# Altium PCB Anya_2620_V1_I1.PcbDoc (part 1 of 2)
Units mm, origin at the board's own origin, x right, y up, seen from the top; angles counter-clockwise.
Board outline 70 x 70 mm, 2 copper layers (Top Layer, Bottom Layer), stack 1.671 mm thick; 61 components, 36 nets, 234 pads, 129 vias.
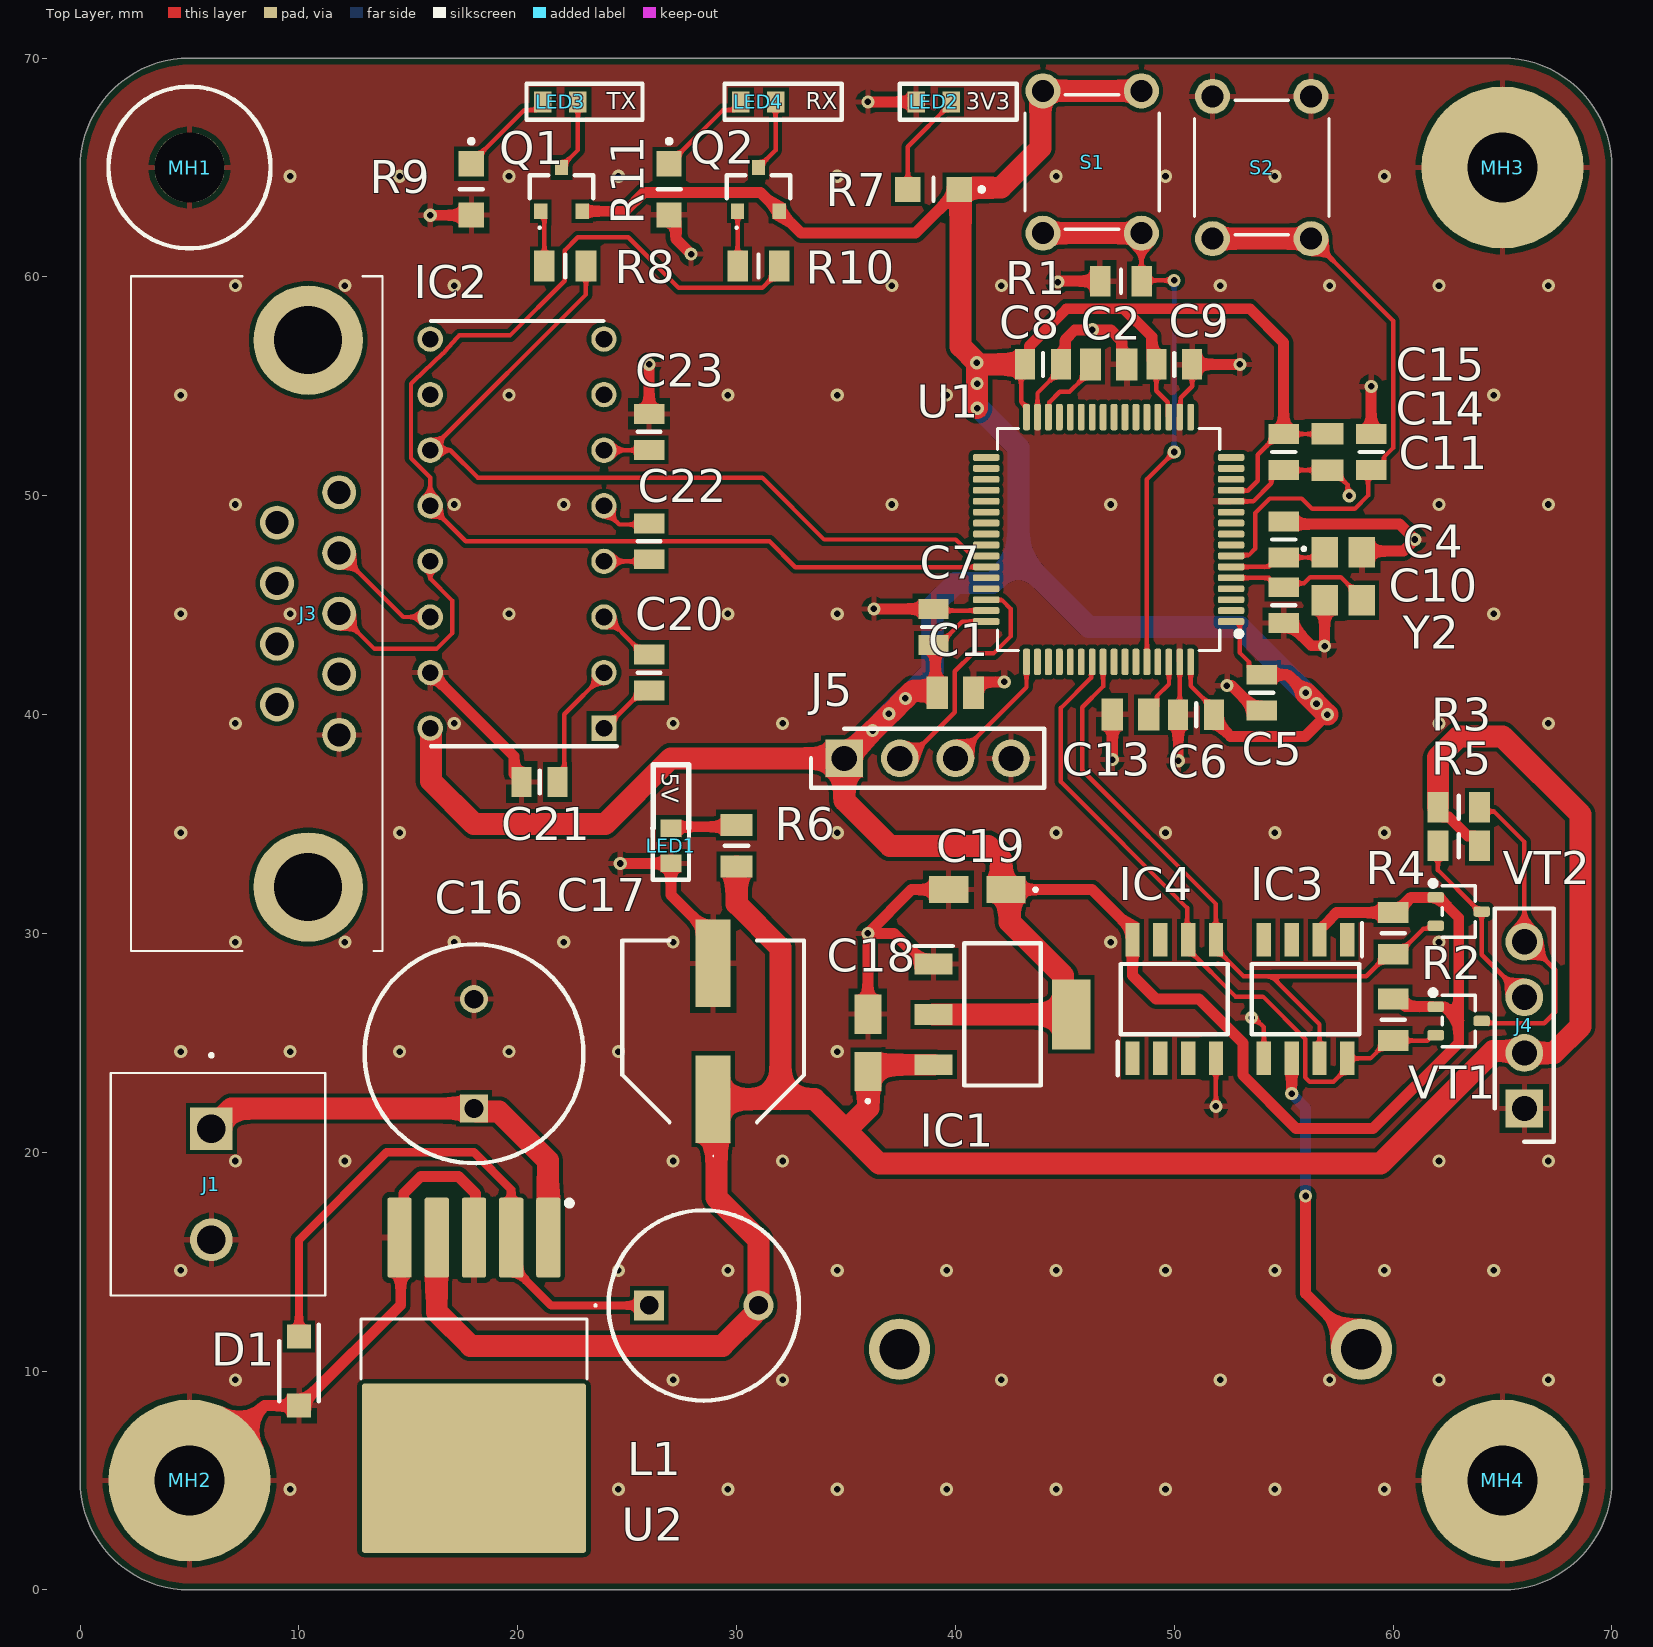
[diagram p0: Top Layer view]
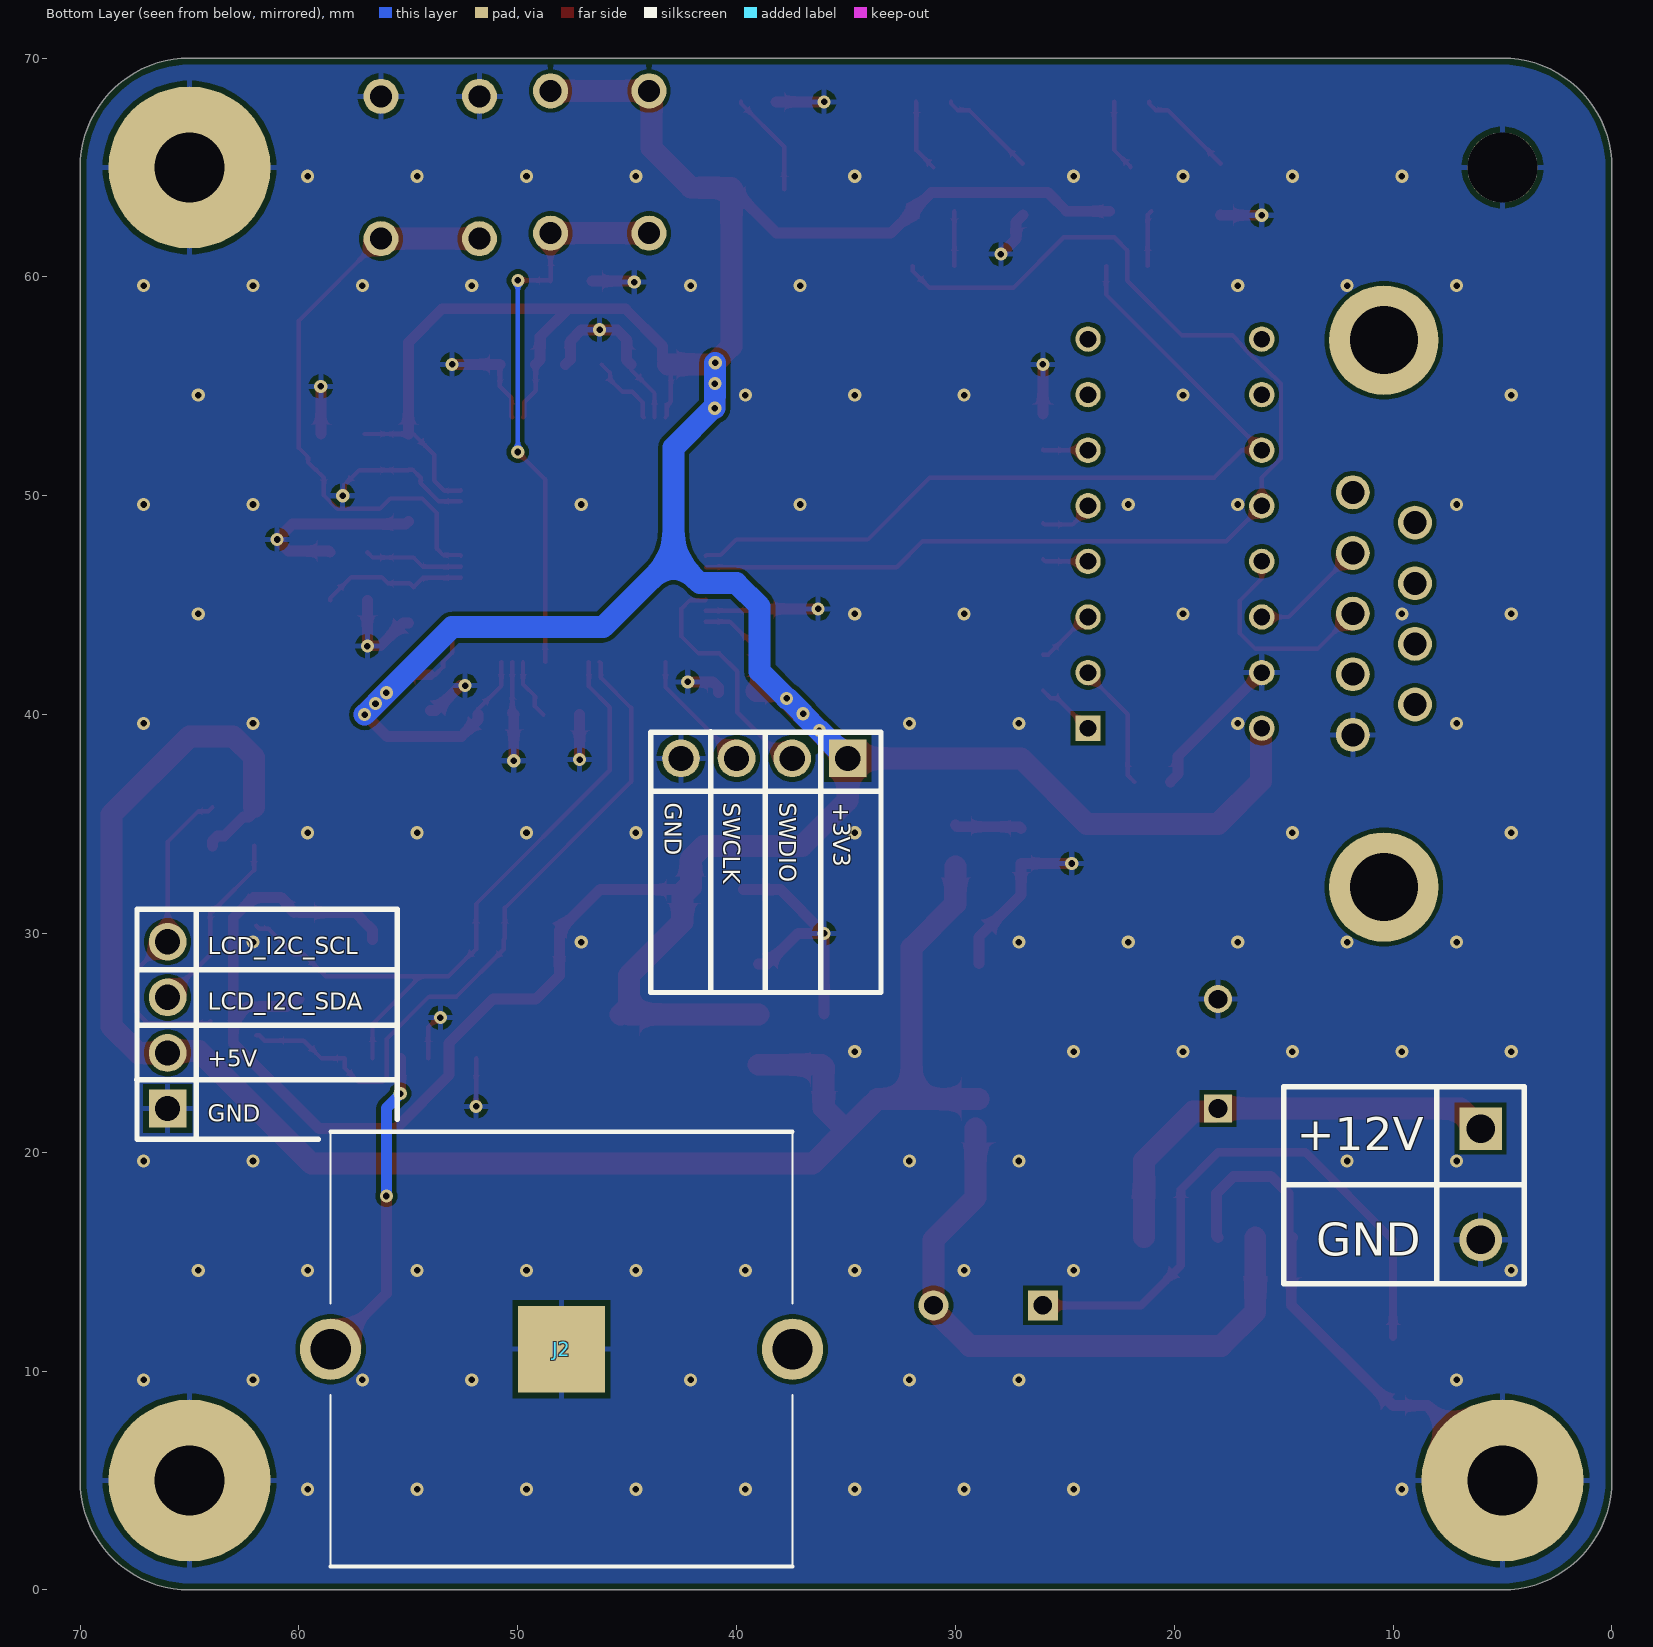
[diagram p1: Bottom Layer view, seen from below]
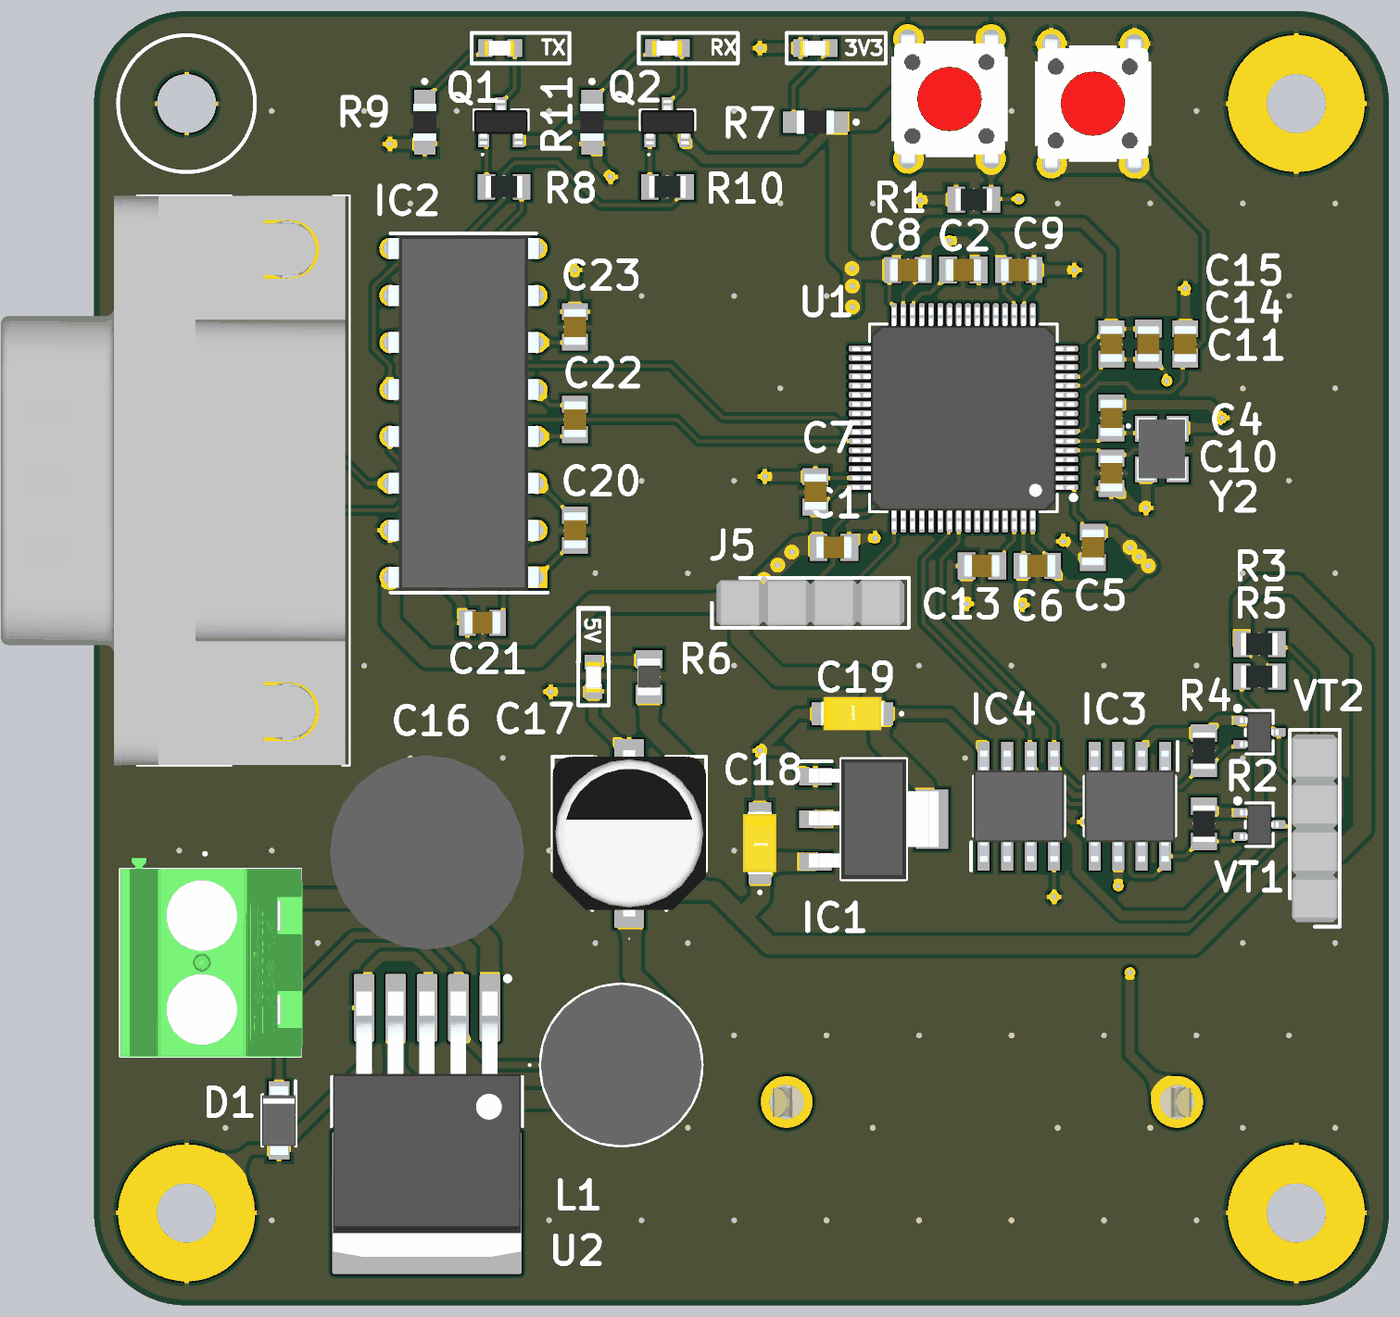
[diagram p2: 3D render of the assembled board from above, using the file's embedded part models]

## Layer stack, top to bottom
Top Solder: solder mask 0.0102, Solder Resist, Dk 3.5
Top Layer: signal copper 0.0356
Dielectric 1: dielectric 1.6, FR-4, Dk 4.8
Bottom Layer: signal copper 0.0356
Bottom Solder: solder mask 0.0102, Solder Resist, Dk 3.5

## Board outline
5,0 cw(c5,5) 0,5 0,65 cw(c5,65) 5,70 65,70 cw(c65,65) 70,65 70,5 cw(c65,5) 65,0

## Design rules (kind name [scope] priority, off if disabled: settings)
BoardOutlineClearance [All] p1: gap=0.3 ignorepadtopadclearanceinfootprint=FALSE
Clearance [All] p1: gap=0.2 ignorepadtopadclearanceinfootprint=TRUE
ComponentClearance [All] p1: gap=0.2 collisioncheckmode=3 verticalgap=0.2 showdistances=FALSE
HoleSize [All] p1: absolutevalues=TRUE maxlimit=10 minlimit=0.2 maxpercent=80.000 minpercent=20.000
HoleToHoleClearance [All] p1: gap=0.3 allowstackedmicrovias=TRUE
MinimumSolderMaskSliver [All] p1: minsoldermaskwidth=0.1
PolygonConnect [All] p1: connectstyle=Relief reliefconductorwidth=0.254 reliefentries=4 polygonreliefangle="90 Angle" airgapwidth=0.254
RoutingVias [All] p1: holewidth=0.3 width=0.6 viastyle="Through Hole" minholewidth=0.3 minwidth=0.6 maxholewidth=0.3 maxwidth=0.6
SilkToSilkClearance [All] p1: silktosilkclearance=0.1
SilkToSolderMaskClearance [IsPad] p1: minsilkscreentomaskgap=0.1 clearancetoexposedcopper=TRUE
SolderMaskExpansion [All] p1: expansion=0.1 istentingtop=FALSE
SupplyNets "Schematic Supply Nets_5" [InNet('+12')] p1: voltage=0.000
SupplyNets "Schematic Supply Nets_4" [InNet('+3.3')] p2: voltage=0.000
SupplyNets "Schematic Supply Nets_3" [InNet('GND')] p3: voltage=0.000
SupplyNets "Schematic Supply Nets_2" [InNet('+5')] p4: voltage=0.000
SupplyNets "Schematic Supply Nets" [InNet('+3_BAT')] p5: voltage=0.000
Width [All] p1: maxlimit=1 minlimit=0.2 preferedwidth=0.5
24 further rules are at their usual default settings.

## Components (designator, comment, footprint, x,y, rotation, side; value= is the part's Value field where it differs from the comment)
C1 "1uF / 50V" CAPC2012X145N 40,41 r180 top
C2 "2.2uF / 16V" CAPC2012X145N 47,56 r180 top
C4 "15pF / 50V" CAPC2012X75N 55,48 r90 top
C5 "100nF / 50V" CAPC2012X95N 54,41 r90 top
C6 "100nF / 50V" CAPC2012X95N 51,40 r0 top
C7 "100nF / 50V" CAPC2012X95N 39,44 r270 top
C8 "100nF / 50V" CAPC2012X95N 44,56 r180 top
C9 "100nF / 50V" CAPC2012X95N 50,56 r180 top
C10 "15pF / 50V" CAPC2012X75N 55,45 r270 top
C11 "100nF / 50V" CAPC2012X95N 59,52 r270 top
C13 "2.2uF / 16V" CAPC2012X145N 48,40 r0 top
C14 "1uF / 50V" CAPC2012X145N 57,52 r90 top
C15 "100nF / 50V" CAPC2012X95N 55,52 r90 top
C16 "680uF / 25V" CAPPRD500W65D1000H1750 18,22 r90 top
C17 "220uF / 16V" EEEFK0J331AL 28.932,25.529 r90 top
C18 "10uF / 10V" T491A 36,25 r90 top
C19 "10uF / 10V" T491A 41,32 r180 top
C20 "100nF / 50V" CAPC2012X95N 26,41.92 r90 top
C21 "100nF / 50V" CAPC2012X95N 21,36.92 r180 top
C22 "100nF / 50V" CAPC2012X95N 26,47.92 r270 top
C23 "100nF / 50V" CAPC2012X95N 26,52.92 r90 top
D1 "SS34LWHRVG" SODFL3718X102N 10,10 r270 top
D2 "LCD" LCD 95,38 r90 top
IC1 "LM1117MP-3.3_NOPB" SOT230P700X180-4N 42.15,26.3 r0 top
IC2 "MAX3232CPE" DIP794W56P254L1918H457Q16N 19.97,48.27 r180 top
IC3 "DS3232MZ_V+T" SOIC127P600X175-8N 56,27 r270 top
IC4 "MB85RC16PNF-G-JNE1" SOIC127P600X175-8N 50,27 r90 top
J1 "1715721" 1715721 6,21.08 r270 top
J2 "3003" 3003 37.445,11 r0 bottom
J3 "L717SDE09PA4CH4RC309" L717SDE09PA4CH4RC309 11.84,50.155 r270 top
J4 "826646-4" HDRV4W68P0X254_1X4_1016X250X880P 66,22 r90 top
J5 "826646-4" HDRV4W68P0X254_1X4_1016X250X880P 34.92,38 r0 top
L1 "33uH / 2A" RLB0912330KL 26,13 r0 top
LED1 "APT1608EC" LEDC1608X85N 27,34 r90 top
LED2 "APT1608EC" LEDC1608X85N 39,68 r0 top
LED3 "APT1608EC" LEDC1608X85N 21.95,68 r0 top
LED4 "APT1608EC" LEDC1608X85N 31,68 r0 top
MH1 "MH_7.4MMNC_3.2MMD" MH_7.4MMD_3.2MMD_NON_COPPER_NPTH 5,65 r0 top locked
MH2 "MH_7.4MMC_3.2MMD" MH_7.4MMD_3.2MMD 5,5 r0 top
MH3 "MH_7.4MMC_3.2MMD" MH_7.4MMD_3.2MMD 65,65 r0 top
MH4 "MH_7.4MMC_3.2MMD" MH_7.4MMD_3.2MMD 65,5 r0 top
Q1 "BC857,215" BC857215 22,64 r0 top
Q2 "BC857,215" BC857215 31,64 r0 top
R1 "10k / 125mW" RESC2012X60N 47.564,59.805 r0 top
R2 "10k / 125mW" RESC2012X60N 60,26.05 r90 top
R3 "10k / 125mW" RESC2012X60N 63,35.767 r180 top
R4 "10k / 125mW" RESC2012X60N 60,30 r90 top
R5 "10k / 125mW" RESC2012X60N 63,34 r0 top
R6 "1k / 125mW" RESC2013X65N 30,34 r90 top
R7 "510R / 125mW" ERJ6ENF1000V 39,64 r180 top
R8 "10k / 125mW" RESC2012X60N 22.165,60.497 r0 top
R9 "510R / 125mW" ERJ6ENF1000V 17.877,64 r270 top
R10 "10k / 125mW" RESC2012X60N 31,60.497 r0 top
R11 "510R / 125mW" ERJ6ENF1000V 26.918,64 r270 top
S1 "1825910-6" TE_1825910-6 46.25,65.25 r90 top
S2 "1825910-6" TE_1825910-6 54,65 r90 top
U1 "STM32H503RBT6" QFP64P50_1200X1200X160L60X22N 47,48 r90 top
U2 "LM2575S-5.0 (UMW)" DPAK6P170_1534X467L254X81T736X1018N 18,8 r180 top
VT1 "BSS138W-7-F" SOT23-3P65_222X100L35X30N 63,26 r270 top value=3.5Ω
VT2 "BSS138W-7-F" SOT23-3P65_222X100L35X30N 63,31 r270 top value=3.5Ω
Y2 "24MHz" 7M24000MEEQT 57.724,46.319 r270 top

## Footprints (in the part's own frame and the unit in brackets; to place one, negate y for a bottom-side part, rotate by r counter-clockwise, add the part's x,y. Pads: shape width x height; smd on the part's side, far side on the other; paste and mask are expansions set on the pad)
7M24000MEEQT [mm]
  rect 1.4x1.2 smd: 1(-1.1,-0.85) 2(1.1,-0.85) 3(1.1,0.85) 4(-1.1,0.85)
  silkscreen extent -1.3,-1.85 -1.2,-1.75, body extent -1.68,-1.33 1.68,1.33, height 0.9
3003 [mm]
  round 2.8 hole 1.85: 1(0,0) 2(21.11,0)
  rect 3.96x3.96 smd: 3(10.555,0)
  silkscreen extent 0,-9.93 21.11,9.93, body extent -0.76,-10.56 21.86,9.3, height 4
1715721 [mm]
  rect 1.95x1.95 hole 1.3: 1(0,0)
  round 1.95 hole 1.3: 2(5.08,0)
  silkscreen extent -3.4,-4.6 7.62,5.2, body extent -3.11,-4.57 7.62,5.26, height 14.2
BC857215 [mm]
  rect 0.6x0.7 smd: 1(-0.95,-1) 2(0.95,-1) 3(0,1)
  silkscreen extent -1.45,-1.8 1.45,0.65, body extent -1.45,-1.2 1.45,1.2, height 0.95
CAPC2012X75N [mm]
  rect 0.91x1.39 smd: 1(-0.82,0) 2(0.82,0)
  silkscreen extent 0,-0.53 0,0.53, body extent -1,-0.63 1,0.63, height 0.75
CAPC2012X95N [mm]
  rect 0.91x1.39 smd: 1(-0.82,0) 2(0.82,0)
  silkscreen extent 0,-0.53 0,0.53, body extent -1,-0.63 1,0.63, height 0.95
CAPC2012X145N [mm]
  rect 0.97x1.47 smd: 1(-0.83,0) 2(0.83,0)
  body extent -1,-0.63 1,0.63, height 1.45
CAPPRD500W65D1000H1750 [mm]
  rect 1.275x1.275 hole 0.85: 1(0,0)
  round 1.275 hole 0.85: 2(5,0)
  silkscreen extent -2.5,-5 7.5,5, body extent -2.75,-5.24 7.75,5.24, height 17.5
DIP794W56P254L1918H457Q16N [mm]
  rect 1.16x1.16 hole 0.76: 1(-3.97,8.89)
  round 1.16 hole 0.76: 2(-3.97,6.35) 3(-3.97,3.81) 4(-3.97,1.27) 5(-3.97,-1.27) 6(-3.97,-3.81) 7(-3.97,-6.35) 8(-3.97,-8.89) 9(3.97,-8.89) 10(3.97,-6.35) 11(3.97,-3.81) 12(3.97,-1.27) 13(3.97,1.27) 14(3.97,3.81) 15(3.97,6.35) 16(3.97,8.89)
  silkscreen extent -4.55,-9.71 3.94,9.71, body extent -4.11,-9.59 4.11,9.59, height 4.57
DPAK6P170_1534X467L254X81T736X1018N [mm] "DPAK, 1.70 mm pitch; 6 pin, 8.40 mm L X 10.03 mm W X 4.67 mm H body"
  rrect18% 1.11x3.66 smd: 1(-3.4,-8.098) 2(-1.7,-8.098) 3(0,-8.098) 4(1.7,-8.098) 5(3.4,-8.098)
  rrect3% 10.24x7.74 smd: TP(0,2.44)
  silkscreen extent -5.17,-9.8 5.17,-1.66, body extent -5.08,-8.98 5.08,5.38, height 4.66
EEEFK0J331AL [mm]
  rect 4x1.6 smd: 1(-3.1,0) 2(3.1,0)
  silkscreen extent -5.72,-4.15 4.15,4.15, body extent -4.5,-4.15 4.5,4.15, height 6.2
ERJ6ENF1000V [mm]
  rect 1.15x1.15 smd: 1(-1.175,0) 2(1.175,0)
  silkscreen extent -2.3,-0.53 0,0.53, body extent -1,-0.63 1,0.63, height 0.6
HDRV4W68P0X254_1X4_1016X250X880P [mm]
  rect 1.725x1.725 hole 1.15: 1(0,0)
  round 1.725 hole 1.15: 2(2.54,0) 3(5.08,0) 4(7.62,0)
  silkscreen extent -1.52,-1.35 9.14,1.35, body extent -1.27,-1.25 8.89,1.25, height 8.66
L717SDE09PA4CH4RC309 [mm]
  round 1.55 hole 1.05: 1(0,0) 2(2.77,0) 3(5.54,0) 4(8.31,0) 5(11.08,0) 6(1.385,-2.84) 7(4.155,-2.84) 8(6.925,-2.84) 9(9.695,-2.84)
  round 5 hole 3.1: MH1(-6.955,-1.42) MH2(18.035,-1.42)
  silkscreen extent -9.88,-9.52 20.96,1.98, body extent -9.86,-16.86 20.95,1.74, height 12.56
LCD [mm]
  body extent -40.05,-18.06 39.95,17.94, height 18.51
LEDC1608X85N [mm]
  rect 0.8x0.95 smd: 1(-0.8,0) 2(0.8,0)
  silkscreen extent -1.55,-0.82 0.8,0.82, body extent -0.83,-0.4 0.78,0.4, height 0.76
MH_7.4MMD_3.2MMD [mm]
  round 7.4 hole 3.2: 1(0,0)
MH_7.4MMD_3.2MMD_NON_COPPER_NPTH [mm]
  round 3.2 hole 3.2 unplated: 1(0,0)
  silkscreen extent -3.7,-3.7 3.7,3.7
QFP64P50_1200X1200X160L60X22N [mm] "Quad Flat Pack (QFP), 0.50 mm pitch; 64 pin, square, 16 pin X 16 pin, 10.00 mm L X 10.00 mm W X 1.60 mm H body"
  rrect52% 0.31x1.21 smd: 1(-3.75,-5.595) 2(-3.25,-5.595) 3(-2.75,-5.595) 4(-2.25,-5.595) 5(-1.75,-5.595) 6(-1.25,-5.595) 7(-0.75,-5.595) 8(-0.25,-5.595) 9(0.25,-5.595) 10(0.75,-5.595) 11(1.25,-5.595) 12(1.75,-5.595) 13(2.25,-5.595) 14(2.75,-5.595) 15(3.25,-5.595) 16(3.75,-5.595) 33(3.75,5.595) 34(3.25,5.595) 35(2.75,5.595) 36(2.25,5.595) 37(1.75,5.595) 38(1.25,5.595) 39(0.75,5.595) 40(0.25,5.595) 41(-0.25,5.595) 42(-0.75,5.595) 43(-1.25,5.595) 44(-1.75,5.595) 45(-2.25,5.595) 46(-2.75,5.595) 47(-3.25,5.595) 48(-3.75,5.595)
  rrect52% 1.21x0.31 smd: 17(5.595,-3.75) 18(5.595,-3.25) 19(5.595,-2.75) 20(5.595,-2.25) 21(5.595,-1.75) 22(5.595,-1.25) 23(5.595,-0.75) 24(5.595,-0.25) 25(5.595,0.25) 26(5.595,0.75) 27(5.595,1.25) 28(5.595,1.75) 29(5.595,2.25) 30(5.595,2.75) 31(5.595,3.25) 32(5.595,3.75) 49(-5.595,3.75) 50(-5.595,3.25) 51(-5.595,2.75) 52(-5.595,2.25) 53(-5.595,1.75) 54(-5.595,1.25) 55(-5.595,0.75) 56(-5.595,0.25) 57(-5.595,-0.25) 58(-5.595,-0.75) 59(-5.595,-1.25) 60(-5.595,-1.75) 61(-5.595,-2.25) 62(-5.595,-2.75) 63(-5.595,-3.25) 64(-5.595,-3.75)
  silkscreen extent -5.07,-6.08 5.07,5.07, body extent -6.02,-6 5.98,6, height 1.6
RESC2012X60N [mm]
  rect 0.95x1.4 smd: 1(-0.95,0) 2(0.95,0)
  silkscreen extent 0,-0.53 0,0.53, body extent -1,-0.6 1,0.6, height 0.45
RESC2013X65N [mm]
  rect 1x1.45 smd: 1(-0.95,0) 2(0.95,0)
  silkscreen extent 0,-0.54 0,0.54, body extent -1,-0.63 1,0.63, height 0.59
RLB0912330KL [mm]
  rect 1.381x1.381 hole 0.85: 1(0,0)
  round 1.381 hole 0.85: 2(5,0)
  silkscreen extent -2.5,-4.35 6.85,4.35, body extent -1.85,-4.34 6.85,4.34, height 11.1
SODFL3718X102N [mm]
  rect 1.09x1.11 smd: 1(-1.575,0) 2(1.575,0)
  silkscreen extent -2.12,-0.9 1.38,0.9, body extent -1.85,-0.9 1.85,0.9, height 1.02
SOIC127P600X175-8N [mm]
  rect 1.525x0.65 smd: 1(-2.712,1.905) 2(-2.712,0.635) 3(-2.712,-0.635) 4(-2.712,-1.905) 5(2.712,-1.905) 6(2.712,-0.635) 7(2.712,0.635) 8(2.712,1.905)
  silkscreen extent -3.47,-2.45 1.6,2.58, body extent -3,-2.45 3,2.45, height 1.75
SOT23-3P65_222X100L35X30N [mm] "Small Outline Transistor, SOT-23 Type, 0.65 mm pitch; 3 pin, 2.00 mm L X 1.25 mm W X 1.00 mm H body"
  rrect42% 0.48x0.75 smd: 1(-0.65,-1.05) 2(0.65,-1.05) 3(0,1.05)
  silkscreen extent -1.41,-1.3 1.17,0.75, body extent -1.07,-1.05 1.07,1.05, height 1.1
SOT230P700X180-4N [mm]
  rect 1.75x0.95 smd: 1(-3.15,2.3) 2(-3.15,0) 3(-3.15,-2.3)
  rect 1.75x3.2 smd: 4(3.15,0)
  silkscreen extent -4.03,-3.25 1.75,3.25, body extent -3.5,-3.25 3.5,3.25, height 1.68
T491A [mm]
  rect 1.8x1.23 smd: 1(-1.31,0) 2(1.31,0)
  silkscreen extent -2.71,-0.05 -2.61,0.05, body extent -1.7,-0.9 1.7,0.9, height 1.81
TE_1825910-6 [mm] "Switches Tactile Switches; 4 pin, 5.99 mm L X 5.99 mm W X 5.00 mm H body"
  round 1.6 hole 1 paste-2539.97 mask+0.05: 1(3.25,2.25) 2(3.25,-2.25) 3(-3.25,2.25) 4(-3.25,-2.25)
  silkscreen extent -3.07,-3.07 3.07,3.07, body extent -3.9,-3 3.9,3, height 5.02

## Part data
C1 C14: library part GRM21BR71H105KA12L, "Capacitor", Manufacturer_Name="Murata Electronics", Mouser Part Number=81-GRM21BR71H105KA2L, Arrow Part Number=GRM21BR71H105KA12L, Arrow Price/Stock=https://www.arrow.com/en/products/grm21br71h105ka12l/murata-manufacturing?utm_currency=USD&region=europe, Datasheet Link=https://search.murata.co.jp/Ceramy/image/img/A01X/G101/ENG/GRM21BR71H105KA12-01.pdf, Height=1.45mm, Manufacturer_Part_Number=GRM21BR71H105KA12L, Mouser Price/Stock=https://www.mouser.co.uk/ProductDetail/Murata-Electronics/GRM21BR71H105KA12L?qs=Er06SXQpt%252B60EIT%2FJ7%2F41Q%3D%3D
C2 C13: library part GRM21BR71C225KA12L, "Capacitor", Manufacturer_Name="Murata Electronics", Mouser Part Number=81-GRM21BR71C225KA2L, Arrow Part Number=GRM21BR71C225KA12L, Arrow Price/Stock=https://www.arrow.com/en/products/grm21br71c225ka12l/murata-manufacturing?region=nac, Datasheet Link=https://search.murata.co.jp/Ceramy/image/img/A01X/G101/ENG/GRM21BR71C225KA12-01A.pdf, Height=1.45mm, Manufacturer_Part_Number=GRM21BR71C225KA12L, Mouser Price/Stock=https://www.mouser.co.uk/ProductDetail/Murata-Electronics/GRM21BR71C225KA12L?qs=vS1sKHMaE9W1mbhDq4LJMA%3D%3D
C4 C10: library part CL21C150JBANNNC, "Capacitor", Manufacturer_Name=SAMSUNG, Datasheet Link=https://datasheet.datasheetarchive.com/originals/distributors/Datasheets_SAMA/65161877d8c1b6ca942dd697d2ecf8eb.pdf, Height=0.75mm, Manufacturer_Part_Number=CL21C150JBANNNC
C5 C6 C7 C8 C9 C11 C15 C20 C21 C22 C23: library part CL21B104KBCNNNC, "Capacitor", Manufacturer_Name=SAMSUNG, Mouser Part Number=187-CL21B104KBCNNNC, Arrow Part Number=CL21B104KBCNNNC, Arrow Price/Stock=https://www.arrow.com/en/products/cl21b104kbcnnnc/samsung-electro-mechanics?utm_currency=USD&region=nac, Datasheet Link=https://datasheet.datasheetarchive.com/originals/distributors/Datasheets_SAMA/86a3eaf0882763ef32124d5901f9b833.pdf, Height=0.95mm, Manufacturer_Part_Number=CL21B104KBCNNNC, Mouser Price/Stock=https://www.mouser.co.uk/ProductDetail/Samsung-Electro-Mechanics/CL21B104KBCNNNC?qs=349EhDEZ59pEfpnm5yBEmQ%3D%3D
C16: library part EEU-FP1E681B, "Capacitor Polarised", Manufacturer_Name=Panasonic, Mouser Part Number=667-EEU-FP1E681B, Arrow Part Number=EEU-FP1E681B, Arrow Price/Stock=https://www.arrow.com/en/products/eeu-fp1e681b/panasonic, Datasheet Link=http://industrial.panasonic.com/cdbs/www-data/pdf/RDF0000/RDF0000C1260.pdf, Height=17.5mm, Manufacturer_Part_Number=EEU-FP1E681B, Mouser Price/Stock=https://www.mouser.co.uk/ProductDetail/Panasonic/EEU-FP1E681B?qs=w%2Fv1CP2dgqpgTnW5K8vWfA%3D%3D
C17: library part EEE-FP1C221AL, "Capacitor Polarised", Manufacturer_Name=Panasonic, Datasheet Link=http://industrial.panasonic.com/cdbs/www-data/pdf/RDE0000/RDE0000C1272.pdf, Height=6.5mm, Manufacturer_Part_Number=EEE-FP1C221AL
C18 C19: library part T491A106K010AT, "Capacitor Polarised", Manufacturer_Name="Yageo Group", Mouser Part Number=80-T491A106K010, Arrow Part Number=T491A106K010AT, Arrow Price/Stock=https://www.arrow.com/en/products/t491a106k010at/kemet-corporation?utm_currency=USD&region=nac, Datasheet Link=https://www.yageogroup.com/content/datasheet/asset/file/KEM_T2005_T491, Height=1.8mm, Manufacturer_Part_Number=T491A106K010AT, Mouser Price/Stock=https://www.mouser.co.uk/ProductDetail/KEMET/T491A106K010AT?qs=VCf6WUQjPgE2CESwzh%252BRVg%3D%3D
D1: "Diode", Manufacturer_Name="Taiwan Semiconductor", Mouser Part Number=821-SS34LWHRVG, Arrow Part Number=SS34LWHRVG, Arrow Price/Stock=https://www.arrow.com/en/products/ss34lwhrvg/taiwan-semiconductor?region=asia, Datasheet Link=https://datasheet.datasheetarchive.com/originals/distributors/DKDS-20/389381.pdf, Height=1.02mm, Manufacturer_Part_Number=SS34LWHRVG, Mouser Price/Stock=https://www.mouser.co.uk/ProductDetail/Taiwan-Semiconductor/SS34LWHRVG?qs=5aG0NVq1C4zYvYQjFNyRbA%3D%3D
IC1: "Integrated Circuit", Arrow Part Number=LM1117MP-3.3/NOPB, Manufacturer_Name="Texas Instruments", Mouser Part Number=926-LM1117MP-3.3NOPB, Arrow Price/Stock=https://www.arrow.com/en/products/lm1117mp-3-3nopb/texas-instruments.html?utm_currency=USD&region=nac, Datasheet Link=http://www.ti.com/general/docs/suppproductinfo.tsp?distId=10&gotoUrl=http%3A%2F%2Fwww.ti.com%2Flit%2Fgpn%2Flm1117, Height=1.8mm, Manufacturer_Part_Number=LM1117MP-3.3/NOPB, Mouser Price/Stock=https://www.mouser.co.uk/ProductDetail/Texas-Instruments/LM1117MP-3.3-NOPB?qs=X1J7HmVL2ZFn4x9DZ4T2hA%3D%3D
IC2: "Integrated Circuit", Manufacturer_Name="Analog Devices", Mouser Part Number=N/A, Datasheet Link=https://eu.mouser.com/datasheet/2/256/MAX3222-MAX3241-1292123.pdf, Height=4.572mm, Manufacturer_Part_Number=MAX3232CPE, Mouser Price/Stock=https://www.mouser.co.uk/ProductDetail/Maxim-Integrated/MAX3232CPE?qs=OjdDRS8jtCZlH34X6oTfKg%3D%3D
IC3: "Integrated Circuit", Arrow Part Number=DS3232MZ/V+T, Manufacturer_Name="Analog Devices", Mouser Part Number=700-DS3232MZ/V+T, Arrow Price/Stock=null?utm_currency=USD&region=nac, Datasheet Link=https://www.maximintegrated.com/en/products/analog/real-time-clocks/DS3232M.html/product-details/tabs-2#modalDatasheet, Height=1.75mm, Manufacturer_Part_Number=DS3232MZ/V+T, Mouser Price/Stock=https://www.mouser.co.uk/ProductDetail/Maxim-Integrated/DS3232MZ-V%2bT?qs=CEvMt6SrWlKJOC%2F9yxJOLQ%3D%3D
IC4: "Integrated Circuit", Manufacturer_Name=Ramxeed, Mouser Part Number=N/A, Datasheet Link=https://componentsearchengine.com/Datasheets/2/MB85RC16PNF-G-JNE1.pdf, Height=1.75mm, Manufacturer_Part_Number=MB85RC16PNF-G-JNE1, Mouser Price/Stock=https://www.mouser.co.uk/ProductDetail/Fujitsu/MB85RC16PNF-G-JNE1?qs=TiOZkKH1s2TCV9lc7rqJ4g%3D%3D
J1: "Connector", Manufacturer_Name="Phoenix Contact", Mouser Part Number=651-1715721, Arrow Part Number=1715721, Arrow Price/Stock=https://www.arrow.com/en/products/1715721/phoenix-contact?utm_currency=USD&region=nac, Datasheet Link=https://www.phoenixcontact.com/en-us/products/printed-circuit-board-terminal-mkds-15-2-508-1715721?type=pdf, Height=13.95mm, Manufacturer_Part_Number=1715721, Mouser Price/Stock=https://www.mouser.co.uk/ProductDetail/Phoenix-Contact/1715721?qs=BYlwlsDsB%2FqgmKyTCSucHg%3D%3D
J2: "Connector", Manufacturer_Name="Keystone Electronics", Mouser Part Number=534-3003, Arrow Part Number=3003, Arrow Price/Stock=https://www.arrow.com/en/products/3003/keystone-electronics?region=europe, Datasheet Link=https://datasheet.datasheetarchive.com/originals/distributors/Datasheets-DGA1/157503.pdf, Height=3.3mm, Manufacturer_Part_Number=3003, Mouser Price/Stock=https://www.mouser.co.uk/ProductDetail/Keystone-Electronics/3003?qs=Mn60vILZNNaTqSonuV33Fw%3D%3D
J3: "Connector", Manufacturer_Name="Amphenol Communications Solutions", Mouser Part Number=523-L7SDE9PA4CH4RC39, Arrow Part Number=L717SDE09PA4CH4RC309, Arrow Price/Stock=https://www.arrow.com/en/products/l717sde09pa4ch4rc309/amphenol-fci?region=nac, Datasheet Link=https://cdn.amphenol-cs.com/media/wysiwyg/files/drawing/l717sdxxxpa4ch4rc309.pdf, Height=12.3mm, Manufacturer_Part_Number=L717SDE09PA4CH4RC309, Mouser Price/Stock=https://www.mouser.co.uk/ProductDetail/Amphenol-Commercial-Products/L717SDE09PA4CH4RC309?qs=wLKqLMNa9uJwTJVotSU7Wg%3D%3D
J4 J5: "Connector", Manufacturer_Name="TE Connectivity", Mouser Part Number=571-826646-4, Arrow Part Number=826646-4, Arrow Price/Stock=https://www.arrow.com/en/products/826646-4/te-connectivity?utm_currency=USD&region=europe, Datasheet Link=https://www.te.com/commerce/DocumentDelivery/DDEController?Action=srchrtrv&DocNm=826629&DocType=Customer+Drawing&DocLang=English&DocFormat=pdf&PartCntxt=826646-4, Height=8.8mm, Manufacturer_Part_Number=826646-4, Mouser Price/Stock=https://www.mouser.co.uk/ProductDetail/TE-Connectivity/826646-4?qs=iFS2b0%2FgCMG%2Fr%252BKRBAlOvw%3D%3D
L1: library part RLB0912-330KL, "Inductor", Manufacturer_Name=Bourns, Mouser Part Number=652-RLB0912-330KL, Arrow Part Number=RLB0912-330KL, Arrow Price/Stock=https://www.arrow.com/en/products/rlb0912-330kl/bourns?utm_currency=USD&region=nac, Datasheet Link=https://www.bourns.com/docs/Product-Datasheets/rlb.pdf, Height=11mm, Manufacturer_Part_Number=RLB0912-330KL, Mouser Price/Stock=https://www.mouser.co.uk/ProductDetail/Bourns/RLB0912-330KL?qs=AC4ivEYFOTADPKm07IwpKA%3D%3D
LED1 LED2 LED3 LED4: "LED", Manufacturer_Name=Kingbright, Mouser Part Number=604-APT1608EC, Arrow Part Number=APT1608EC, Arrow Price/Stock=https://www.arrow.com/en/products/apt1608ec/kingbright?utm_currency=USD&region=nac, Datasheet Link=https://datasheet.datasheetarchive.com/originals/distributors/Datasheets-16/DSA-306624.pdf, Height=0.85mm, Manufacturer_Part_Number=APT1608EC, Mouser Price/Stock=https://www.mouser.co.uk/ProductDetail/Kingbright/APT1608EC?qs=y3UkhjaxUTbvcINjaB1ATQ%3D%3D
MH1: "Mounting Hole 7.4mm Diameter (Non Copper), 3.2mm Drill"
MH2 MH3 MH4: "Mounting Hole 7.4mm Diameter, 3.2mm Drill"
Q1 Q2: "Transistor BJT PNP", Manufacturer_Name=Nexperia, Mouser Part Number=771-BC857215, Arrow Part Number=BC857,215, Arrow Price/Stock=https://www.arrow.com/en/products/bc857215/nexperia?utm_currency=USD&region=europe, Datasheet Link=https://assets.nexperia.com/documents/data-sheet/BC856_BC857_BC858.pdf, Height=1.1mm, Manufacturer_Part_Number=BC857,215, Mouser Price/Stock=https://www.mouser.co.uk/ProductDetail/Nexperia/BC857215?qs=me8TqzrmIYWtuVsCNoXfHg%3D%3D
R1 R2 R3 R4 R5 R8 R10: library part RC0805FR-0710KL, "Resistor", Manufacturer_Name="Yageo Group", Mouser Part Number=603-RC0805FR-0710KL, Arrow Part Number=RC0805FR-0710KL, Arrow Price/Stock=https://www.arrow.com/en/products/rc0805fr0710kl/yageo.html?utm_currency=USD&region=europe, Datasheet Link=https://www.yageo.com/upload/media/product/productsearch/datasheet/rchip/PYu-RC_Group_51_RoHS_L_11.pdf, Height=0.6mm, Manufacturer_Part_Number=RC0805FR-0710KL, Mouser Price/Stock=https://www.mouser.co.uk/ProductDetail/YAGEO/RC0805FR-0710KL?qs=7bY8808IzHq6vrU3BeiiYw%3D%3D
R6: library part 0805W8F1001T5E, "Resistor", Manufacturer_Name=ROYALOHM, Mouser Part Number=303-0805W8F1001T5E, Datasheet Link=https://www.mouser.de/datasheet/2/1365/1-3044649.pdf, Height=0.65mm, Manufacturer_Part_Number=0805W8F1001T5E, Mouser Price/Stock=https://www.mouser.co.uk/ProductDetail/Royalohm/0805W8F1001T5E?qs=e8oIoAS2J1RgTTQhbYTt7g%3D%3D
R7 R9 R11: library part ERJ-6ENF5100V, "Resistor", Manufacturer_Name=Panasonic, Mouser Part Number=667-ERJ-6ENF5100V, Datasheet Link=https://industrial.panasonic.com/cdbs/www-data/pdf/RDA0000/AOA0000C84.pdf, Height=0.7mm, Manufacturer_Part_Number=ERJ-6ENF5100V, Mouser Price/Stock=https://www.mouser.co.uk/ProductDetail/Panasonic/ERJ-6ENF5100V?qs=50QC8w71jAsaos0hOIX1VA%3D%3D
S1 S2: "Switch Tactile OFF (ON) SPST Round Button PC Pins 0.05A 24VDC 1.57N Thru-Hole Loose", Color=Black, Contact Current Rating=50mA, Contact Resistance=100mΩ, Insulation Resistance=100MΩ, Manufacturer="TE Connectivity", Manufacturer Lifecycle Status=ACTIVE, Max Operating Temperature=85°C, Max Voltage Rating (DC)=24V, Min Operating Temperature=-35°C, Operating Force=1.568N, Supplier Part Number=C428628, Actuator Length=1.397mm, Actuator Material="PBT, Polyacetal, Resin", Category="Pushbutton Switches", China RoHS=Compliant, ComponentLink1Description=https://datasheet.octopart.com:443/1825910-6-TE-Connectivity-datasheet-10294628.pdf?src-supplier=HQonline, ComponentLink1URL=https://datasheet.octopart.com:443/1825910-6-TE-Connectivity-datasheet-10294628.pdf?src-supplier=HQonline, ComponentLink2Description=https://datasheet.octopart.com:443/1825910-6-TE-Connectivity-datasheet-179971975.pdf?src-supplier=IHS, ComponentLink2URL=https://datasheet.octopart.com:443/1825910-6-TE-Connectivity-datasheet-179971975.pdf?src-supplier=IHS, ComponentLink3Description=https://datasheet.octopart.com:443/FSM4JH-TE-Connectivity---AMP-datasheet-512274.pdf?src-supplier=IHS, ComponentLink3URL=https://datasheet.octopart.com:443/FSM4JH-TE-Connectivity---AMP-datasheet-512274.pdf?src-supplier=IHS, ComponentLink4Description=https://datasheet.octopart.com:443/1825910-6-TE-Connectivity---Alcoswitch-datasheet-181441334.pdf?src-supplier=IHS, ComponentLink4URL=https://datasheet.octopart.com:443/1825910-6-TE-Connectivity---Alcoswitch-datasheet-181441334.pdf?src-supplier=IHS, ComponentLink5Description=https://datasheet.octopart.com:443/FSM4JH-TE-Connectivity-datasheet-181317608.pdf?src-supplier=IHS, ComponentLink5URL=https://datasheet.octopart.com:443/FSM4JH-TE-Connectivity-datasheet-181317608.pdf?src-supplier=IHS, ComponentLink6Description=https://sigma.octopart.com:443/101748000/technical_drawing/TE-Connectivity-1825910-6.pdf?src-supplier=Sager+Electronics, ComponentLink6URL=https://sigma.octopart.com:443/101748000/technical_drawing/TE-Connectivity-1825910-6.pdf?src-supplier=Sager+Electronics, ComponentLink7Description=https://sigma.octopart.com:443/12291753/technical_drawing/TE-Connectivity-1825910-6.pdf?src-supplier=Burklin+Elektronik, ComponentLink7URL=https://sigma.octopart.com:443/12291753/technical_drawing/TE-Connectivity-1825910-6.pdf?src-supplier=Burklin+Elektronik, ComponentLink8Description=https://datasheet.octopart.com:443/FSM4JH-Tyco-Electronics-datasheet-5302851.pdf?src-supplier=Upverter, ComponentLink8URL=https://datasheet.octopart.com:443/FSM4JH-Tyco-Electronics-datasheet-5302851.pdf?src-supplier=Upverter, ComponentLink9Description=https://sigma.octopart.com:443/58177301/technical_drawing/TE-Connectivity-1825910-6.pdf?src-supplier=TE+Connectivity, ComponentLink9URL=https://sigma.octopart.com:443/58177301/technical_drawing/TE-Connectivity-1825910-6.pdf?src-supplier=TE+Connectivity, ComponentLink10Description=https://datasheet.octopart.com:443/1825910-6-TE-Connectivity-datasheet-33021037.pdf?src-supplier=Farnell, ComponentLink10URL=https://datasheet.octopart.com:443/1825910-6-TE-Connectivity-datasheet-33021037.pdf?src-supplier=Farnell, ComponentLink11Description=https://datasheet.octopart.com:443/FSM4JH-Tyco-Electronics-datasheet-12163206.pdf?src-supplier=Farnell, ComponentLink11URL=https://datasheet.octopart.com:443/FSM4JH-Tyco-Electronics-datasheet-12163206.pdf?src-supplier=Farnell, ComponentLink12Description=https://datasheet.octopart.com:443/FSM4JH-Alcoswitch-datasheet-41434433.pdf?src-supplier=Master+Electronics, ComponentLink12URL=https://datasheet.octopart.com:443/FSM4JH-Alcoswitch-datasheet-41434433.pdf?src-supplier=Master+Electronics, ComponentLink13Description=https://datasheet.octopart.com:443/1825910-6-TE-Connectivity---AMP-datasheet-189108451.pdf?src-supplier=Master+Electronics, ComponentLink13URL=https://datasheet.octopart.com:443/1825910-6-TE-Connectivity---AMP-datasheet-189108451.pdf?src-supplier=Master+Electronics, ComponentLink14Description=https://datasheet.octopart.com:443/1825910-6-TE-Connectivity-datasheet-145419878.pdf?src-supplier=RS+(Formerly+Allied+Electronics), ComponentLink14URL=https://datasheet.octopart.com:443/1825910-6-TE-Connectivity-datasheet-145419878.pdf?src-supplier=RS+(Formerly+Allied+Electronics), ComponentLink15Description=https://datasheet.octopart.com:443/FSM4JH-Agastat-datasheet-15984561.pdf?src-supplier=RS+(Formerly+Allied+Electronics), ComponentLink15URL=https://datasheet.octopart.com:443/FSM4JH-Agastat-datasheet-15984561.pdf?src-supplier=RS+(Formerly+Allied+Electronics), ComponentLink16Description=https://datasheet.octopart.com:443/1825910-6-TE-Connectivity-datasheet-140613545.pdf?src-supplier=TME, ComponentLink16URL=https://datasheet.octopart.com:443/1825910-6-TE-Connectivity-datasheet-140613545.pdf?src-supplier=TME, ComponentLink17Description=https://datasheet.octopart.com:443/1825910-6-TE-Connectivity---AMP-datasheet-23715110.pdf?src-supplier=Electro+Sonic, ComponentLink17URL=https://datasheet.octopart.com:443/1825910-6-TE-Connectivity---AMP-datasheet-23715110.pdf?src-supplier=Electro+Sonic, ComponentLink18Description=http://sigma.octopart.com:80/14574207/rohs_statement/TE-Connectivity-1825910-6.pdf?src-supplier=Compliance+Statements, ComponentLink18URL=http://sigma.octopart.com:80/14574207/rohs_statement/TE-Connectivity-1825910-6.pdf?src-supplier=Compliance+Statements, ComponentLink19Description=http://sigma.octopart.com:80/41598133/materials_sheet/TE-Connectivity-1825910-6.pdf?src-supplier=Compliance+Statements, ComponentLink19URL=http://sigma.octopart.com:80/41598133/materials_sheet/TE-Connectivity-1825910-6.pdf?src-supplier=Compliance+Statements, ComponentLink20Description=http://sigma.octopart.com:80/78006367/materials_sheet/TE-Connectivity-1825910-6.pdf?src-supplier=Compliance+Statements, ComponentLink20URL=http://sigma.octopart.com:80/78006367/materials_sheet/TE-Connectivity-1825910-6.pdf?src-supplier=Compliance+Statements, ComponentLink21Description=http://sigma.octopart.com:80/136693561/materials_sheet/TE-Connectivity-1825910-6.pdf?src-supplier=Compliance+Statements, ComponentLink21URL=http://sigma.octopart.com:80/136693561/materials_sheet/TE-Connectivity-1825910-6.pdf?src-supplier=Compliance+Statements, ComponentLink22Description=http://sigma.octopart.com:80/14555950/rohs_certificate/Agastat-FSM4JH.pdf?src-supplier=Compliance+Statements, ComponentLink22URL=http://sigma.octopart.com:80/14555950/rohs_certificate/Agastat-FSM4JH.pdf?src-supplier=Compliance+Statements, Contact Material=Copper, Contact Plating=Silver, Current Rating=50mA, Electrical Life=100kcycles, ELV=Compliant, Export Control Classification Number (ECCN) Code=EAR99, Harmonized Tariff Schedule (HTS) Code=8536.50.90.40, Height=3.61mm, Housing Material=Nylon, Illumination Type="Illuminated, Non-Illuminated", Introduction Date=2010-05-28, Lead Free="Lead Free", Length=5.99mm, Life (Cycles)=100kcycles, Lifecycle Status=Production, Manufacturer Part Number=1825910-6, Material=Nylon, Max Current Rating=50mA, Mechanical Life=100kcycles, Mounting Technology="Through Hole", Number of Positions=1, Orientation=Straight, Packaging=Bulk, Pricing="5=0.1374, 50=0.1164, 150=0.1059, 750=0.094, 2250=0.0877, 5250=0.0845 (USD)", REACH SVHC=Yes, RoHS=Compliant, Stock=15605, Supplier=LCSC, Switch Function=Off-Mom, Switch Travel=250µm, Termination="PC Pin, PC Pins", Throw Configuration=SPST, Type=Switch, Voltage Rating (DC)=24V, Width=6mm
U1: "RISC Microcontroller, 32-Bit, FLASH, CORTEX-M4F CPU, 180MHz, CMOS, PBGA216", Manufacturer=STMicroelectronics, Supplier Part Number=C6807804, Category=Microcontrollers, ComponentLink1Description=https://datasheet.octopart.com:443/STM32H503RBT6-STMicroelectronics-datasheet-188928330.pdf?src-supplier=TME, ComponentLink1URL=https://datasheet.octopart.com:443/STM32H503RBT6-STMicroelectronics-datasheet-188928330.pdf?src-supplier=TME, Country of Origin="Mainland China, Taiwan", Export Control Classification Number (ECCN) Code=3A991.A.2, Harmonized Tariff Schedule (HTS) Code=8542.31.00.30, Lifecycle Status=Production, Manufacturer Part Number=STM32H503RBT6, Pricing="1=3.5339, 10=3.0062, 30=2.6936, 160=2.3779, 480=2.2319, 960=2.1659 (USD)", REACH SVHC=Yes, RoHS=Compliant, Stock=883, Supplier=LCSC
U2: "52kHz Buck Fixed 2A 5V TO-263-5 Voltage Regulators - DC DC Switching Regulators RoHS", Case/Package=TO-263, Manufacturer=UMW, Manufacturer Lifecycle Status=ACTIVE, Manufacturer Part Number=LM2575S-5.0(UMW), Max Operating Temperature=125°C, Max Output current=1A, Max Supply Voltage=40V, Min Input Voltage=4V, Min Operating Temperature=-40°C, Nominal Output Voltage=5V, Quiescent Current=10mA, Supplier Part Number=C347405, Switching Frequency=58kHz, Category="Voltage Regulators - Switching", ComponentLink1Description=https://www.lcsc.com/datasheet/C347405.pdf, ComponentLink1URL=https://www.lcsc.com/datasheet/C347405.pdf, Contact Plating=Tin, Efficiency=77%, Height=4.83mm, Length=10.16mm, Lifecycle Status=Production, Mounting Technology="Surface Mount", Number of Channels=1, Number of Outputs=1, Operating Supply Voltage=40V, Output Current=1A, Output Type=Fixed, Output Voltage=5V, Pins=5, Pricing="1=1.997, 10=1.709, 30=1.5282, 100=1.2674, 500=1.1826, 1000=1.1474 (USD)", Radiation Hardening=No, REACH SVHC=No, RoHS=Compliant, Schedule B="8542390000, 8542390000|8542390000|8542390000|8542390000, 8542390000|8542390000|8542390000|8542390000|8542390000|8542390000|8542390000|8542390000|8542390000|8542390000|8542390000|8542390000|8542390000|8542390000|8542390000|8542390000|8542390000|8542390000|8542390000|8542390000|8542390000|8542390000|8542390000|85", Stock=1142, Supplier=LCSC, Synchronous Rectifier=No, Thickness=4.58mm, Topology=Buck, Width=8.42mm
VT1 VT2: "Transistor: N-MOSFET; unipolar; 50V; 0.2A; 3.5ohm; 0.2W; -55+150 deg.C; SMD; SOT323(SC70)", Case/Package=SOT-323, Continuous Drain Current (ID)=200mA, Current=2A, Drain to Source Breakdown Voltage=75V, Drain to Source Resistance=3.5Ω, Drain to Source Voltage (Vdss)=50V, Gate to Source Voltage (Vgs)=20V, Input Capacitance=50pF, Manufacturer="Diodes Inc.", Max Operating Temperature=150°C, Max Power Dissipation=200mW, Min Operating Temperature=-55°C, Supplier Part Number=C24553, Threshold Voltage=1.2V, Category=MOSFETs, China RoHS=Compliant, ComponentLink1Description=https://datasheet.octopart.com:443/BSS138W-7-F-Diodes-Inc.-datasheet-180551831.pdf?src-supplier=Newark, ComponentLink1URL=https://datasheet.octopart.com:443/BSS138W-7-F-Diodes-Inc.-datasheet-180551831.pdf?src-supplier=Newark, ComponentLink2Description=https://datasheet.octopart.com:443/BSS138W-7-F-Diodes-Inc.-datasheet-10330874.pdf?src-supplier=Newark, ComponentLink2URL=https://datasheet.octopart.com:443/BSS138W-7-F-Diodes-Inc.-datasheet-10330874.pdf?src-supplier=Newark, ComponentLink3Description=https://datasheet.octopart.com:443/BSS138W-7-F-Diodes-Inc.-datasheet-37113701.pdf?src-supplier=Newark, ComponentLink3URL=https://datasheet.octopart.com:443/BSS138W-7-F-Diodes-Inc.-datasheet-37113701.pdf?src-supplier=Newark, ComponentLink4Description=https://datasheet.octopart.com:443/BSS138W-7-F-Diodes-Inc.-datasheet-8424047.pdf?src-supplier=Newark, ComponentLink4URL=https://datasheet.octopart.com:443/BSS138W-7-F-Diodes-Inc.-datasheet-8424047.pdf?src-supplier=Newark, ComponentLink5Description=https://datasheet.octopart.com:443/BSS138W-7-F-Diodes-Inc.-datasheet-115885208.pdf?src-supplier=Diodes+Inc+SCT, ComponentLink5URL=https://datasheet.octopart.com:443/BSS138W-7-F-Diodes-Inc.-datasheet-115885208.pdf?src-supplier=Diodes+Inc+SCT, ComponentLink6Description=https://sigma.octopart.com:443/138896157/technical_drawing/Diodes-Inc.-BSS138W-7-F.pdf?src-supplier=Diodes+Inc+SCT, ComponentLink6URL=https://sigma.octopart.com:443/138896157/technical_drawing/Diodes-Inc.-BSS138W-7-F.pdf?src-supplier=Diodes+Inc+SCT, ComponentLink7Description=https://datasheet.octopart.com:443/BSS138W-7-F-Diodes-Inc.-datasheet-133631.pdf?src-supplier=Mouser, ComponentLink7URL=https://datasheet.octopart.com:443/BSS138W-7-F-Diodes-Inc.-datasheet-133631.pdf?src-supplier=Mouser, ComponentLink8Description=https://datasheet.octopart.com:443/BSS138W-7-F-Diodes-Inc.-datasheet-14061695.pdf?src-supplier=iiiC, ComponentLink8URL=https://datasheet.octopart.com:443/BSS138W-7-F-Diodes-Inc.-datasheet-14061695.pdf?src-supplier=iiiC, ComponentLink9Description=https://datasheet.octopart.com:443/BSS138W-7-F-Diodes-Inc.-datasheet-7840986.pdf?src-supplier=Jameco, ComponentLink9URL=https://datasheet.octopart.com:443/BSS138W-7-F-Diodes-Inc.-datasheet-7840986.pdf?src-supplier=Jameco, ComponentLink10Description=http://sigma.octopart.com:80/15540767/rohs_statement/Diodes-Inc.-BSS138W-7-F.pdf?src-supplier=Compliance+Statements, ComponentLink10URL=http://sigma.octopart.com:80/15540767/rohs_statement/Diodes-Inc.-BSS138W-7-F.pdf?src-supplier=Compliance+Statements, Contact Plating=Tin, Current Rating=200mA, Dual Supply Voltage=50V, Element Configuration=Single, Height=1mm, Lead Free="Lead Free", Length=2.2mm, Lifecycle Status=Production, Manufacturer Part Number=BSS138W-7-F, Min Breakdown Voltage=50V, Mounting Technology="Surface Mount", Nominal Vgs=1.2V, Number of Channels=1, Number of Elements=1, Number of Terminals=3, Pins=3, Power Dissipation=200mW, Pricing="10=0.034, 10=0.039, 10=0.3113, 10=0.2851, 100=0.0313, 100=0.2498, 100=0.0273, 100=0.2288, 300=0.0239, 300=0.0274, 300=0.2003, 300=0.2187, 3000=0.0245, 3000=0.1791, 3000=0.1956, 3000=0.0214, 6000=0.0194, 6000=0.1623, 6000=0.0222, 6000=0.1772, 9000=0.0184, 9000=0.0211, 9000=0.1543, 9000=0.1684 (EUR)", Rds On Max=3.5Ω, REACH SVHC=Yes, RoHS=Compliant, Schedule B="8541210080, 8541210080|8541210080|8541210080|8541210080|8541210080", Stock=14390, Supplier=LCSC, Supplier 1=LCSC, Supplier Part Number 1=C24553, Termination=SMD/SMT, Turn-Off Delay Time=20ns, Turn-On Delay Time=20ns, Voltage=50V, Voltage Rating (DC)=50V, Weight=6.010099mg, Width=1.35mm
Y2: library part 7M-24.000MEEQ-T, "Crystal or Oscillator", Manufacturer_Name="TXC CORPORATION", Mouser Part Number=717-7M-24.000MEEQ-T, Arrow Part Number=7M-24.000MEEQ-T, Arrow Price/Stock=https://www.arrow.com/en/products/7m-24.000meeq-t/txc-corporation?utm_currency=USD&region=europe, Datasheet Link=https://componentsearchengine.com/Datasheets/2/7M-24.000MEEQ-T.pdf, Height=0.8mm, Manufacturer_Part_Number=7M-24.000MEEQ-T, Mouser Price/Stock=https://www.mouser.co.uk/ProductDetail/TXC-Corporation/7M-24.000MEEQ-T?qs=65dIHZNch5uAabLkulpaow%3D%3D

## Via types
v1: diameter 0.6, hole 0.3, Top Layer to Bottom Layer, tented both sides, 96 vias
v2: diameter 0.6, hole 0.3, Top Layer to Bottom Layer, 33 vias

## Nets (pads, with @x,y where several pads share a name; then routed paths per layer and width w, separated by ;. In a path a pad name is that pad's centre, name@x,y a point inside that pad or via, vN(x,y) a via of type N, cw(c..) or ccw(c..) an arc to the next point about the centre after c; other vN are vias at no path point)
+3.3: C1.2 C5.2 C6.2 C7.2 C8.2 C9.2 C14.2 C15.2 C19.1 IC1.2 IC1.4 IC2.16 IC3.2 IC4.8 J5.1 Q1.2 Q2.2 R2.2 R4.2 R7.1 S1.1 S1.2 U1.1 U1.13 U1.19 U1.32 U1.48 U1.64 VT1.1 VT2.1 | length 235.9
  Top Layer w0.2: C7.2 39.24,43.18 40.31,44.25 U1.48 ; C8.2 43,55.82 43,54.295 43.195,54.1 43.195,53.65 U1.32 ; C9.2 49.18,54.802 49.705,54.277 49.705,53.64 U1.19 ; U1.64 50.75,41.31 51.82,40.24 C6.2 ; U1.1 52.945,44.25 53,44.195 53,42.82 53.413,42.407 53.413,42.175 53.768,41.82 C5.2 ; U1.13 52.617,50.228 53.354,50.228 53.812,50.687 53.812,51.872 54.76,52.82 C15.2 C14.2@56.99,52.82
  Top Layer w0.5: Q1.2 24.915,63 25.765,63.85 31.1,63.85 31.85,63.1 31.9,63.1 31.95,63.05 Q2.2 32.95,62 38.175,62 R7.1 ; C7.2 39.085,43.095 C1.2@39.085,41.085 ; C19.1@42.595,32 46.244,32 48.095,30.15 IC4.8 48.095,28.074 49.169,27 51.128,27 53.139,24.989 53.139,23.52 55.572,21.087 59.087,21.087 63,25 63,26 ; C8.2 43.385,56.205 43.385,56.845 45.085,58.546 53.454,58.546 55,57 C15.2 ; 47.728,58.513 48.975,57.266 48.975,56.205 C9.2 ; C6.2 51.82,39.76 52.58,39 55.973,39 56.973,40 v2(57,40) ; C5.2 55.18,41.82 v2(56,41) ; IC3.2 56.635,30.15 57.13,30.645 57.13,30.661 57.419,30.95 R4.2 ; R2.2 60.225,27 60.572,26.653 VT1.1@61.825,26.653 ; R4.2@60.225,30.95 60.45,31.175 60.45,31.275 60.825,31.65 VT2.1 ; VT1.1@61.835,26.65 VT1.1 62.35,26.65 63,26 ; VT2.1@62.065,31.65 63,30.715 63,26
  Top Layer w1: IC2.16 16.031,39.349 16.031,36.969 18,35 24,35 27,38 J5.1 34.92,36.08 37,34 41.502,34 42.088,33.414 42.088,32.115 42.203,32 C19.1 ; J5.1@34.955,38 v2(36.219,39.265) v2@36.977,40.023 ; v2@37.014,40.04 v2(37.715,40.741) 38.059,41.085 C1.2@39.085,41.085 ; IC1.2 IC1.4@44.925,26.3 ; R7.1 40.25,64.075 42.075,64.075 43.885,65.885 43.885,68.385 S1.1 S1.2 ; R7.1@40.237,63.938 40.237,56.829 40.975,56.091 v2(40.975,56.079) v2@40.993,56.06 ; v2(41,54) 41,54.559 40.993,54.566 v2(40.993,55.125) v2@40.993,56.06 ; C19.1@42.358,32 42.473,31.885 42.473,30.527 44.925,28.075 44.925,26.675 IC1.4 ; C8.2@43.135,56 41.054,56 v2@40.993,56.06 ; v2(56,41) v2(57,40)
  Bottom Layer w1: J5.1 36.165,39.245 36.2,39.245 v2(36.219,39.265) 36.96,40.005 v2(36.96,40.04) 37.661,40.741 v2(37.715,40.741) 38.948,41.974 38.948,44.948 40.007,46.007 41.676,46.007 42.883,47.214 ; v2(40.975,56.079) 40.993,56.06 v2(40.993,55.125) 40.993,54.566 41,54.559 v2(41,54) 41.081,54 42.883,52.198 42.883,47.214 ; v2(57,40) v2(56,41) 53,44 46.097,44 42.883,47.214
  other v2: 56.5,40.5
+3_BAT: IC3.6 J2.2 | length 14.6
  Top Layer w0.5: IC3.6 55.368,24.285 55.368,22.685 v2(55.371,22.681) ; v2(56,18) 56,13.555 J2.2
  Bottom Layer w0.5: v2(55.371,22.681) 55.371,22.654 56,22.026 v2(56,18)
+5: C17.1 C18.1 IC1.3 J4.2 L1.2 R3.2 R5.2 R6.1 U2.4 | length 113.1
  Top Layer w0.5: R3.2 62.05,35.542 62.275,35.317 62.544,35.317 63.411,34.45 63.725,34.45 63.95,34.225 R5.2
  Top Layer w1: U2.4 16.3,12.7 17.847,11.153 29.353,11.153 30.809,12.61 30.809,12.706 31,12.897 L1.2 31,16 29.08,17.92 C17.1@29.08,21.08 ; C17.1 32,22.429 ; R6.1 30,31.351 32,29.351 32,22.429 ; IC1.3 36.115,24 36,23.885 C18.1 36.027,23.663 36.027,22.027 35,21 ; R3.2 62.05,38.05 63,39 65,39 68.563,35.437 68.563,25.748 67.348,24.533 66.212,24.533 J4.2@66.08,24.401 ; J4.2 65.913,24.627 64.572,24.627 59.424,19.479 36.521,19.479 35,21 ; 32,22.429 33.571,22.429 34,22 34.5,21.5 35,21
+12: C16.1 J1.1 U2.1 | length 20.2
  Top Layer w1: J1.1 6.92,22 C16.1 18.137,21.862 19.138,21.862 21.378,19.622 U2.1@21.378,16.12
"DB9 _USART_RX": IC2.14 J3.2 | length 5.4
  Top Layer w0.2: J3.2 14.765,44.46 IC2.14
DB9_USART_TX: IC2.13 J3.3 | length 9.8
  Top Layer w0.2: J3.3 13.455,43 16.289,43 17,43.711 17,45.213 16,46.213 IC2.13
GND: C1.1 C2.1 C4.2 C5.1 C6.1 C7.1 C8.1 C9.1 C10.2 C11.1 C13.1 C14.1 C15.1 C16.2 C17.2 C18.2 C19.2 C21.2 C23.2 D1.2 IC1.1 IC2.15 IC3.5 IC4.4 J1.2 J2.3 J3.5 J4.1 J5.4 LED1.1 LED2.1 MH1.1 MH2.1 MH3.1 MH4.1 R1.1 R9.2 R11.2 S2.1 S2.2 U1.12 U1.18 U1.31 U1.47 U1.63 U2.3 U2.5 Y2.2 Y2.4 | length 116
  Top Layer w0.2: C7.1@39.07,44.75 U1.47 ; U1.31 43.75,54.69 44.82,55.76 C8.1 ; C6.1@50.251,40.071 U1.63@50.251,42.404 ; U1.18 50.295,53.64 50.295,54.48 50.82,55.005 C9.1 ; v2(51.905,22.095) IC4.4 ; U1.12@52.604,49.741 53.605,49.741 54.435,50.571 54.435,50.825 54.79,51.18 C15.1 55.01,51.17 57.25,51.17 57.923,50.497 57.923,50.077 v2(58,50) ; v2(53.539,26.155) 53.647,26.155 53.939,25.863 53.954,25.863 54.095,25.721 IC3.5
  Top Layer w0.5: MH2.1 8.425,8.425 D1.2 10.295,8.72 10.353,8.72 14.653,13.021 14.653,16.045 U2.5 ; U2.5@14.791,16.289 14.791,18.111 15.57,18.89 17.295,18.89 18.074,18.111 18.074,16.172 U2.3 ; IC2.15 19.825,38.095 19.825,37.275 C21.2 ; v2(16.003,62.818) 17.87,62.818 R9.2 ; v2(24.685,33.195) 26.995,33.195 LED1.1 27,31.761 28.932,29.829 C17.2 ; C23.2 v2(26,56) ; R11.2 27.233,62.51 27.233,61.735 v2(27.925,61.043) ; C18.2 v2(36,30) ; v2(36,68) LED2.1 ; v2(36.271,44.831) 38.989,44.831 C7.1@39.07,44.75 ; IC1.1 38.6,28.6 37.2,30 v2(36,30) ; C19.2 38,32 v2(36,30) ; C1.1 40.83,41.25 41.074,41.494 v2(42.233,41.494) ; v2(44.675,59.764) 44.702,59.764 44.747,59.809 46.611,59.809 R1.1 ; C8.1 45.025,56.205 45.025,57.139 45.454,57.568 46.241,57.568 v2(46.26,57.587) 46.28,57.568 47.104,57.568 47.595,57.077 47.595,56.235 C2.1 ; C13.1 47.177,39.993 v2(47.177,37.944) ; v2(50.184,37.89) 50.184,39.996 C6.1 C6.1@50.251,40.071 ; C9.1 v2(53,56) ; v2(52.404,41.327) 52.613,41.327 53.76,40.18 C5.1 ; C10.2 55.24,44.18 56.274,43.146 56.854,43.146 v2(56.874,43.126) Y2.2 ; C4.2 55.119,48.701 60.299,48.701 v2(61,48) 60.469,47.469 58.624,47.469 Y2.4 ; C11.1 v2(59,55)
  other v1: 9.6,4.6 24.6,4.6 29.6,4.6 34.6,4.6 39.6,4.6 44.6,4.6 49.6,4.6 54.6,4.6 59.6,4.6 7.1,9.6 27.1,9.6 32.1,9.6 42.1,9.6 52.1,9.6 57.1,9.6 62.1,9.6 67.1,9.6 4.6,14.6 24.6,14.6 29.6,14.6 34.6,14.6 39.6,14.6 44.6,14.6 49.6,14.6 54.6,14.6 59.6,14.6 64.6,14.6 7.1,19.6 12.1,19.6 27.1,19.6 32.1,19.6 62.1,19.6 67.1,19.6 4.6,24.6 9.6,24.6 14.6,24.6 19.6,24.6 24.6,24.6 34.6,24.6 7.1,29.6 12.1,29.6 17.1,29.6 22.1,29.6 27.1,29.6 47.1,29.6 62.1,29.6 4.6,34.6 14.6,34.6 34.6,34.6 44.6,34.6 49.6,34.6 54.6,34.6 59.6,34.6 7.1,39.6 17.1,39.6 27.1,39.6 32.1,39.6 62.1,39.6 67.1,39.6 4.6,44.6 9.6,44.6 19.6,44.6 29.6,44.6 34.6,44.6 64.6,44.6 7.1,49.6 17.1,49.6 22.1,49.6 37.1,49.6 47.1,49.6 62.1,49.6 67.1,49.6 4.6,54.6 19.6,54.6 29.6,54.6 34.6,54.6 39.6,54.6 64.6,54.6 7.1,59.6 12.1,59.6 17.1,59.6 37.1,59.6 42.1,59.6 52.1,59.6 57.1,59.6 62.1,59.6 67.1,59.6 9.6,64.6 14.6,64.6 19.6,64.6 24.6,64.6 34.6,64.6 44.6,64.6 49.6,64.6 54.6,64.6 59.6,64.6
I2C_SCL: IC3.8 IC4.6 R2.1 U1.55 VT1.2 | length 32.1
  Top Layer w0.2: U1.55 46.205,42.36 46.205,41.691 44.82,40.306 44.82,36.932 50.588,31.165 50.588,29.759 IC4.6 50.635,29.275 52.797,27.112 54.053,27.112 55.99,25.175 55.99,23.421 56.186,23.225 57.28,23.225 57.905,23.85 IC3.8 58.963,24.288 59.775,25.1 R2.1 61.565,25.1 61.815,25.35 VT1.2
I2C_SDA: IC3.7 IC4.5 R4.1 U1.56 VT2.2 | length 32.2
  Top Layer w0.2: U1.56 46.75,41.286 45.797,40.333 45.797,37.454 51.905,31.346 51.905,29.275 52.13,29.049 52.16,29.049 53.165,28.045 54.442,28.045 ; IC3.7 56.635,25.851 54.442,28.045 ; R4.1@60.6,29.425 60.225,29.05 59.775,29.05 58.77,28.045 54.442,28.045 ; R4.1@60.6,29.425 61.385,30.21 61.81,30.21 VT2.2
LCD_I2C_SCL: J4.4 R3.1 VT1.3 | length 14.8
  Top Layer w0.2: R3.1 64.142,35.575 64.608,35.575 66,34.183 J4.4 66.14,29.62 67.416,28.344 67.416,26.406 66.91,25.9 64.15,25.9 VT1.3
LCD_I2C_SDA: J4.3 R5.1 VT2.3 | length 8.6
  Top Layer w0.2: R5.1 62.05,32.893 63.775,31.167 63.775,31.14 63.915,31 VT2.3 64.05,29.03 J4.3
NetC2_2: C2.2 U1.30 | length 3.5
  Top Layer w0.2: U1.30 44.295,53.64 44.295,54.277 44.766,54.748 45.216,54.748 45.785,55.317 45.785,55.615 C2.2
NetC11_2: C11.2 S2.3 S2.4 U1.7 | length 27
  Top Layer w0.2: U1.7 52.64,47.295 53.411,47.295 53.703,47.587 53.703,49.214 54.365,49.876 55.826,49.876 56.302,49.4 58.249,49.4 58.859,50.011 58.859,50.825 59.214,51.18 59.232,51.18 59.587,51.535 59.587,51.767 60,52.18 60,58 S2.4
  Top Layer w1: S2.3 S2.4
NetC13_2: C13.2 U1.62 | length 2.8
  Top Layer w0.2: C13.2 49.215,40.385 49.215,40.848 49.758,41.391 U1.62@49.758,42.397
NetC20_1: C20.1 IC2.1 | length 2.8
  Top Layer w0.2: IC2.1 24.42,39.86 24.457,39.86 25.342,40.745 25.645,40.745 C20.1
NetC20_2: C20.2 IC2.3 | length 2.8
  Top Layer w0.2: IC2.3 24.05,44.46 25.405,43.105 25.405,43.095 25.76,42.74 C20.2
NetC21_1: C21.1 IC2.2 | length 5.9
  Top Layer w0.2: C21.1 22.129,37.229 22.129,40.016 23.94,41.827 IC2.2
NetC22_1: C22.1 IC2.5 | length 2.5
  Top Layer w0.2: IC2.5 23.94,49.38 24.633,48.686 25.946,48.686 C22.1
NetC22_2: C22.2 IC2.4 | length 2.1
  Top Layer w0.2: IC2.4 25.9,47 C22.2
NetC23_1: C23.1 IC2.6 | length 2.1
  Top Layer w0.2: IC2.6 25.98,52.08 C23.1
NetD1_1: D1.1 L1.1 U2.2 | length 27
  Top Layer w0.381: D1.1 10,16 14,20 18,20 19.7,18.3 19.7,14.823 21.523,13 L1.1
NetLED1_2: LED1.2 R6.2 | length 3.1
  Top Layer w0.5: LED1.2 27.075,34.875 29.925,34.875 R6.2
NetLED2_2: LED2.2 R7.2 | length 4.8
  Top Layer w0.2: R7.2 37.825,65.95 39.8,67.925 LED2.2
NetLED3_1: LED3.1 R9.1 | length 4.5
  Top Layer w0.2: R9.1 18.352,65.65 18.352,65.683 20.294,67.625 20.85,67.625 21.15,67.925 LED3.1
NetLED3_2: LED3.2 Q1.3 | length 3.3
  Top Layer w0.2: Q1.3 22,65.05 22.75,65.8 LED3.2
NetLED4_1: LED4.1 R11.1 | length 4.5
  Top Layer w0.2: R11.1 27.393,65.65 27.4,65.65 29.375,67.625 29.9,67.625 30.2,67.925 LED4.1
NetLED4_2: LED4.2 Q2.3 | length 3.3
  Top Layer w0.2: Q2.3 31.783,65.783 31.783,67.983 LED4.2
NetQ1_1: Q1.1 R8.1 | length 2.6
  Top Layer w0.2: Q1.1 21.215,62.835 R8.1
NetQ2_1: Q2.1 R10.1 | length 2.5
  Top Layer w0.2: R10.1 Q2.1
NetR1_2: R1.2 S1.3 S1.4 U1.60 | length 26.2
  Top Layer w0.2: S1.4 48.5,59.82 R1.2 48.55,59.841 v2(49.997,59.841) ; U1.60 48.75,50.75 v2(50,52)
  Top Layer w1: S1.3 S1.4
  Bottom Layer w0.2: v2(49.997,59.841) v2(49.997,59.841) 49.998,52.002 v2(50,52)
OSC_IN: C10.1 U1.5 Y2.3 | length 6.8
  Top Layer w0.2: U1.5 54.33,46.25 54.76,45.82 54.94,46 55.93,46 56.209,46.278 57.615,46.278 58.574,45.319 Y2.3
OSC_OUT: C4.1 U1.6 Y2.1 | length 4.6
  Top Layer w0.2: U1.6 54.33,46.75 54.76,47.18 C4.1 56.635,47.18 Y2.1
SWCLK: J5.3 U1.49 | length 5.8
  Top Layer w0.2: J5.3 43.25,41.25 U1.49
SWDIO: J5.2 U1.46 | length 11
  Top Layer w0.2: J5.2 37.867,38 39.969,40.102 39.969,40.668 39.97,40.669 39.97,41.331 39.969,41.332 39.969,41.975 40.789,42.796 41.743,42.796 42.521,43.574 42.521,44.836 42.126,45.231 41.424,45.231 U1.46
USART1_RX: IC2.12 R10.2 U1.43 | length 54.4
  Top Layer w0.2: R10.2 31.95,60.272 31.175,59.497 27.362,59.497 25.047,61.813 22.744,61.813 22.143,61.212 22.143,59.826 19.646,57.329 17.329,57.329 17.212,57.212 16.664,56.582 cw(c16,57.16) 16.589,56.506 15.237,55.237 15.12,55.12 15.12,55.037 15.12,51.715 16,50.835 IC2.12 17.624,47.916 31.502,47.916 32.68,46.738 U1.43@41.393,46.738
USART1_TX: IC2.11 R8.2 U1.42 | length 38.8
  Top Layer w0.2: R8.2 23.115,59.195 IC2.11 16.92,52.08 18.18,50.82 31.18,50.82 34,48 40.018,48 40.723,47.295 41.36,47.295 U1.42
pads on no net: IC2.7 IC2.8 IC2.9 IC2.10 IC3.1 IC3.3 IC3.4 IC4.1 IC4.2 IC4.3 IC4.7 J2.1 J3.1 J3.4 J3.6 J3.7 J3.8 J3.9 J3.MH1 J3.MH2 U1.2 U1.3 U1.4 U1.8 U1.9 U1.10 U1.11 U1.14 U1.15 U1.16 U1.17 U1.20 U1.21 U1.22 U1.23 U1.24 U1.25 U1.26 U1.27 U1.28 U1.29 U1.33 U1.34 U1.35 U1.36 U1.37 U1.38 U1.39 U1.40 U1.41 U1.44 U1.45 U1.50 U1.51 U1.52 U1.53 U1.54 U1.57 U1.58 U1.59 U1.61 U2.TP

## Polygon pours and split planes (outlines as drawn)
GND on Bottom Layer "GND_L02_P000" (solid, pour order 0): 70,70 70,0 0,0 0,70
GND on Top Layer "GND_L01_P002" (solid, pour order 2): 0,70 0,0 70,0 70,70

## Silkscreen, mask and mechanical layers (free items; w line width, h text height)
Top Overlay:
  lines w0.2: 22.75,67.175 25.7,67.175 25.7,68.825 22.75,68.825 ; 31.85,67.175 34.8,67.175 34.8,68.825 31.85,68.825 ; 39.85,67.175 42.8,67.175 42.8,68.825 39.85,68.825
  lines w0.25: 26.175,34.8 26.194,34.819 26.194,37.7 27.81,37.7 27.81,34.815 27.825,34.8
  text "TX" at 24.069,67.669 h0.76
  text "RX" at 33.169,67.669 h0.76
  text "3V3" at 40.461,67.639 h0.76
  text "5V" at 26.569,37.331 h0.76 r270
Bottom Overlay:
  lines w0.25: 4,18.5 4.004,18.504 14.97,18.504 ; 8,14 8,23 ; 33.4,36.5 43.866,36.5 ; 36.159,27.3 36.159,39.187 ; 38.7,27.3 38.7,39.2 ; 41.187,27.3 41.187,39.209 ; 55.5,21.5 55.5,31.1 67.4,31.1 67.4,20.585 59.115,20.585 ; 55.5,23.313 67.409,23.313 ; 55.5,25.8 67.4,25.8 ; 55.5,28.341 67.387,28.341 ; 64.7,20.634 64.7,31.1 ; 4,14 15,14 15,23 4,23 4,14 ; 33.4,27.3 33.4,39.2 43.915,39.2 43.915,27.3 33.4,27.3
  text "+3V3" at 35.573,35.973 h0.76 r90
  text "SWDIO" at 38.046,35.973 h0.76 r90